# Altium PCB PCB1.PcbDoc (part 3 of 3)
Units mil, origin at the board's own origin, x right, y up, seen from the top; angles counter-clockwise.
Board outline 2560 x 1880 mil, 4 copper layers (Top Layer, GND, VCC, Bottom Layer), stack 23.756 mil thick; 156 components, 113 nets, 519 pads, 219 vias.
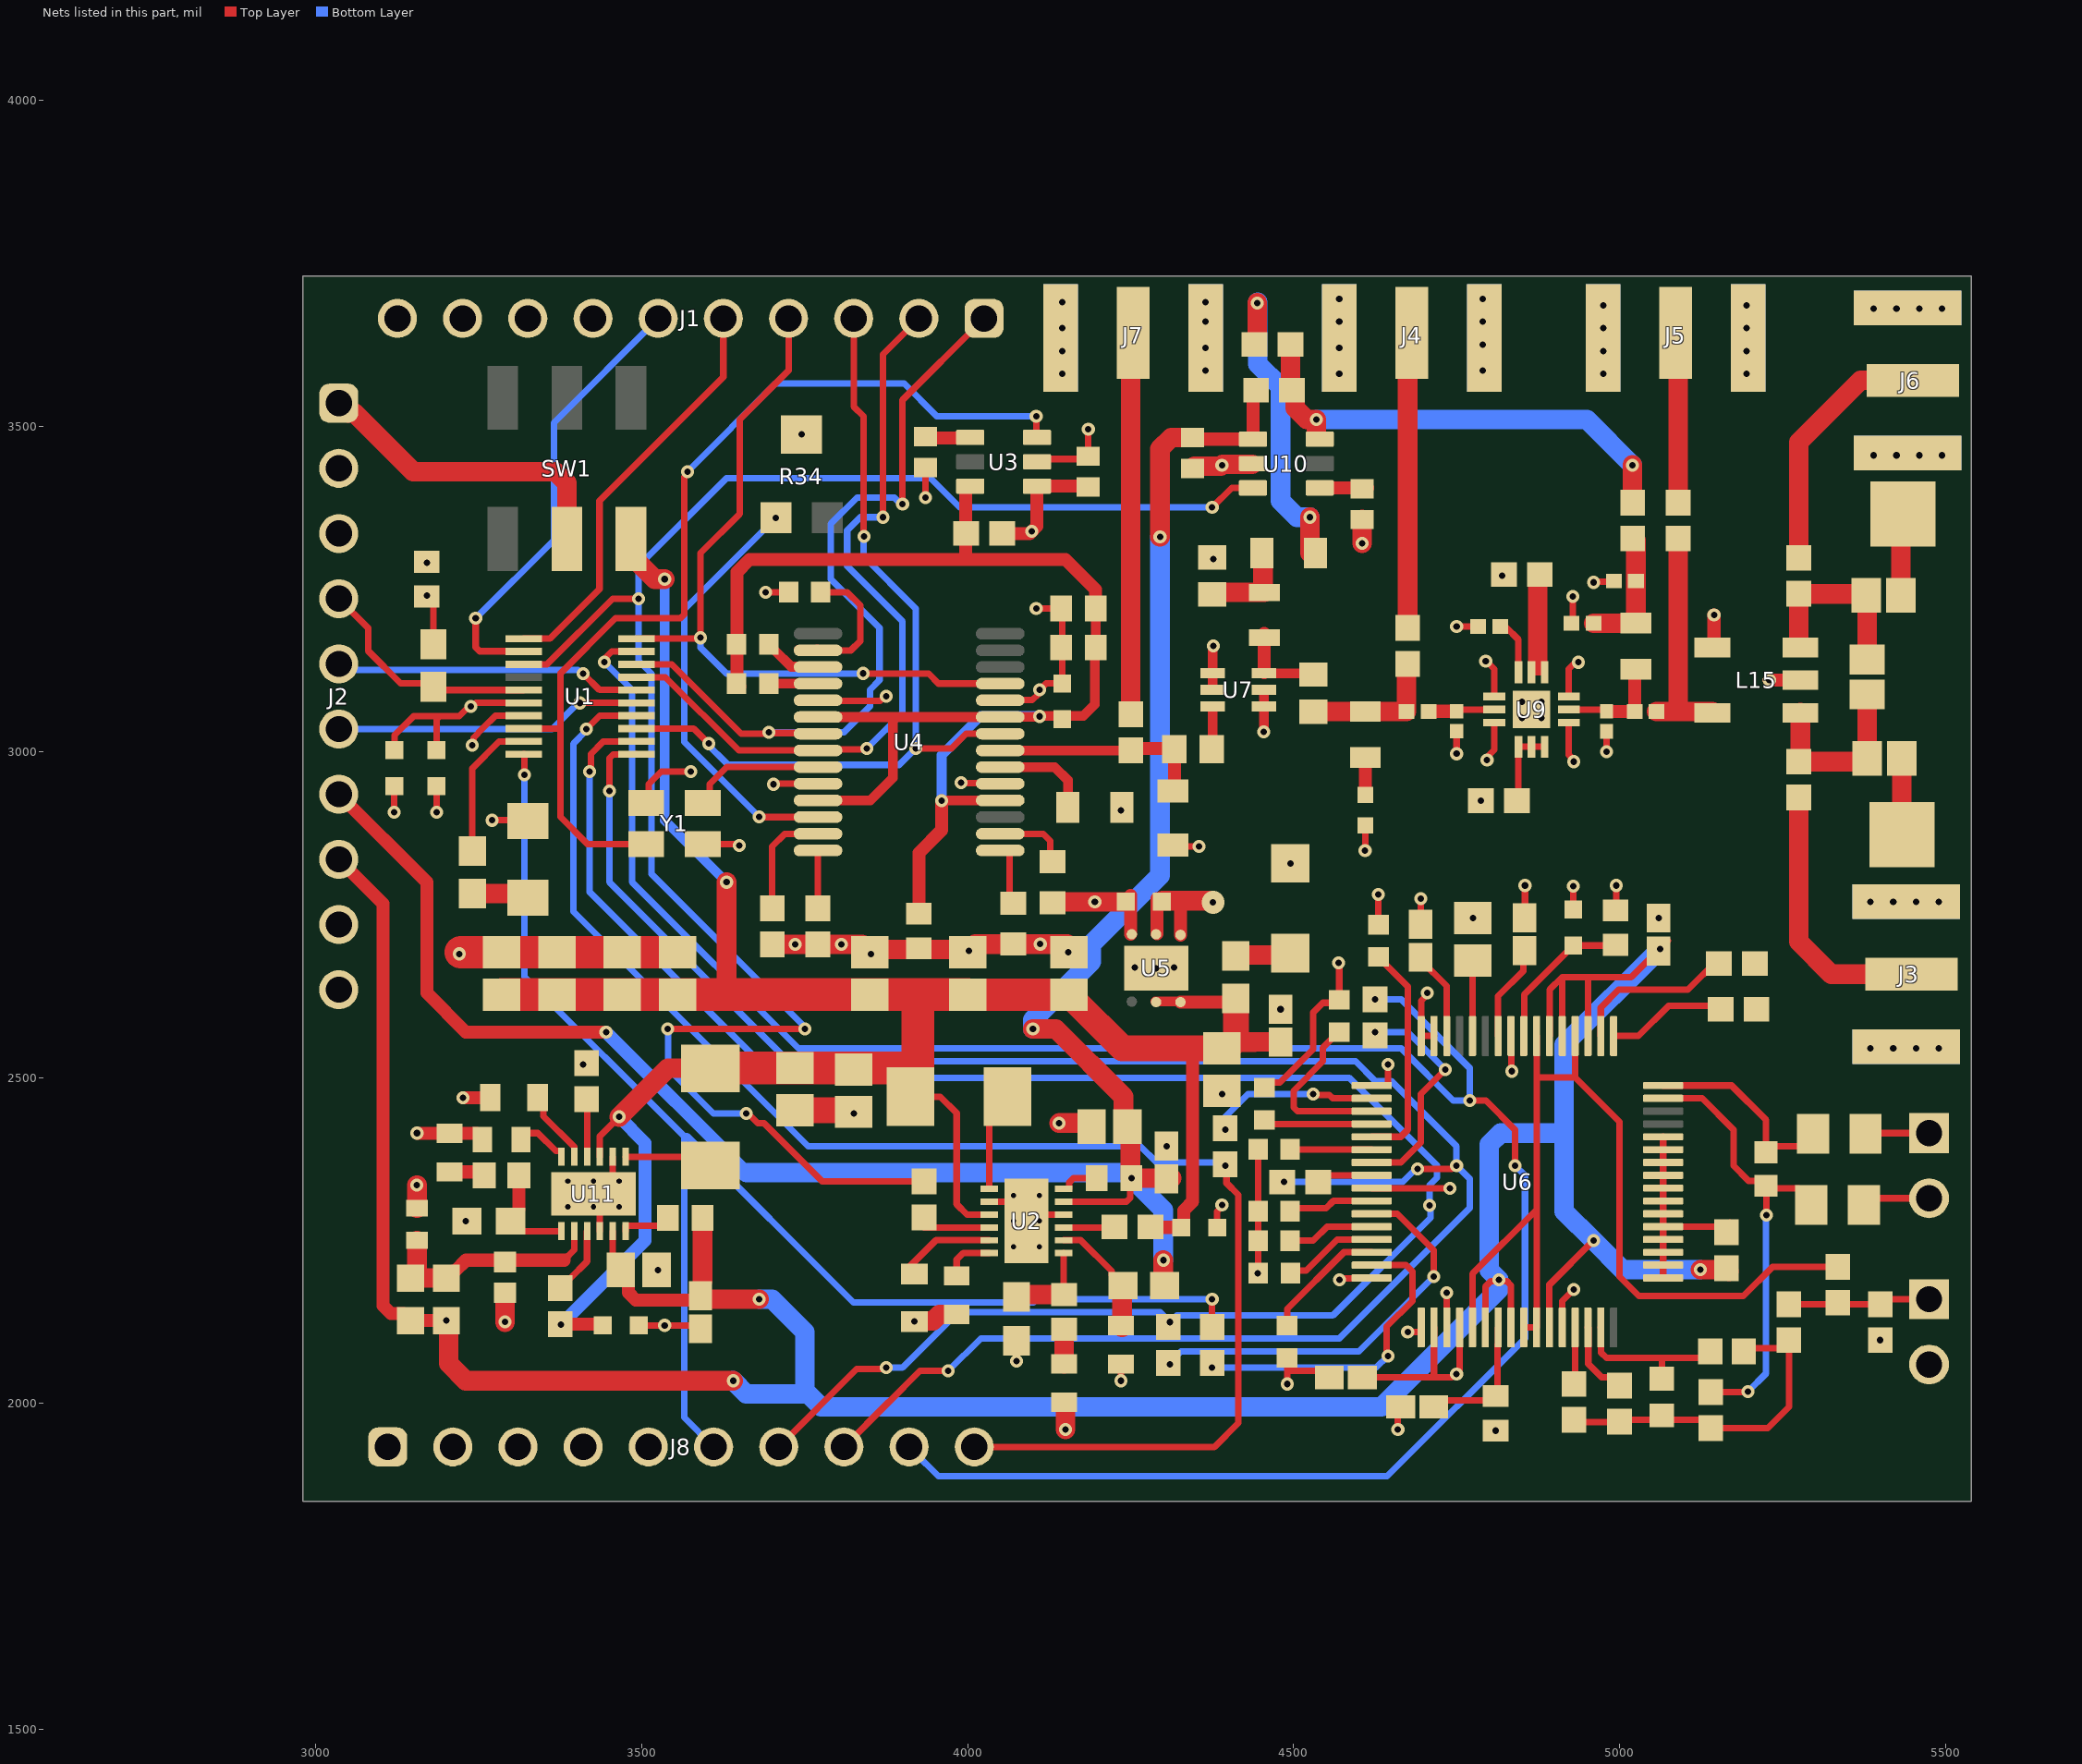
[diagram p4: the nets of this part, all layers, seen from the top]

## Via types
v1: diameter 20, hole 10, Top Layer to Bottom Layer, tented both sides, 206 vias
v2: diameter 19.68, hole 7.87, Top Layer to Bottom Layer, 12 vias
v3: diameter 35, hole 10, Top Layer to Bottom Layer, tented both sides, 1 vias

## Nets (pads, with @x,y where several pads share a name; then routed paths per layer and width w, separated by ;. In a path a pad name is that pad's centre, name@x,y a point inside that pad or via, vN(x,y) a via of type N, cw(c..) or ccw(c..) an arc to the next point about the centre after c; other vN are vias at no path point)
3V3: C1.2 C2.2 C3.2 C11.2 C20.2 C26.1 J2.9 R2.2 R12.2 R43.2 R61.2 U1.6 U3.1 U5.1 U5.2 U6.48 U6.50 U6.52 Y1.4 | length 1472
  Top Layer w10: C1.2@3120,3002.56 3120.48,3003.04 3120.48,3025.48 3150,3055 3190,3055 ; v1(3170,3240) 3180,3230 R2.2@3180,3165 ; C3.2@3185,3002.56 3185,3050 3190,3055 ; v1(3237.32,3069.84) 3234.62,3069.84 3219.77,3055 3190,3055 ; v1@3237.32,3072.68 3238.24,3071.76 3241.94,3071.76 3245.34,3075.16 U1.6@3318.5,3075.16 ; Y1.4@3506.69,2921.5 3510.32,2925.13 3510.32,2950.32 3529.82,2969.82 v1(3574.82,2969.82) ; R61.2@4458.94,2485 4458.94,2485.67 4465.99,2492.72 4479.09,2492.72 4530,2543.62 4530,2600 4544.87,2614.87 4565.5,2614.87 R43.2@4570,2619.37 v1@4570,2675 ; v1(4570.36,2190) 4573.06,2190 4575.3,2192.24 4619.17,2192.24 U6.48@4619.69,2192.75 ; C26.1@4610,2039.4 4610.6,2040 4742.29,2040 4747.29,2045 v1(4750,2045) 4750,2047.71 4754.73,2052.43 U6.52@4754.73,2116.77 ; 4715.36,2040.39 U6.50@4715.36,2116.77
  Top Layer w20: R12.2@4052.6,3335 4095,3335 v1(4098.09,3338.09) 4106.18,3346.18 U3.1@4106.18,3407.6 ; U3.1@4097.64,3407.6 U3.1@4106.18,3407.6 ; C11.2@4185,3406.38 C11.2@4186.38,3405 ; C11.2@4185,3407.6 U3.1@4106.18,3407.6 ; U5.2@4290.15,2721.15 C20.2@4290.15,2775 ; C20.2@4297.56,2770 C20.2@4299.03,2771.47 ; U5.1@4326.41,2719.17 4326.41,2771.47
  Top Layer w30: C20.2@4299.03,2771.47 4326.41,2771.47 4370.57,2771.47 4371.92,2770.12 4375.46,2770.12 v3(4376.41,2769.17)
  other v1: 4569.1,2676.29
3V3DDS: C13.2 C14.2 C15.2 C17.2 R12.1 R24.1 R35.1 U3.6 U4.6 U4.11 U4.18 U4.23 | length 2212.7
  Top Layer w10: v1(3960,2925) v1@3960.22,2925.22 ; U4.18@4049.55,2925.22 U4.18@4049.76,2925.43 ; C15.2@4196.17,3220.4 C15.2@4196.57,3220
  Top Layer w15: U4.11@3770.24,2925.43 3850.43,2925.43 3885,2960 3885,3053.39 ; U4.6@3770.24,3053.39 3885,3053.39 ; v1@3960.22,2925.22 U4.18@4049.55,2925.22 ; v1(4110,3054.41) 4109.49,3053.9 4050.28,3053.9 U4.23@4049.76,3053.39 3885,3053.39 ; v1@4110,3055 4142.44,3055 C17.2@4152.44,3055 ; C17.2@4157.66,3055.1 4177.16,3055.1 4195,3072.94 4195,3168.43 4196.57,3170 4196.57,3210 C15.2@4191.17,3215.4
  Top Layer w20: R24.1@3645.32,3105 R24.1@3650.24,3100.08 ; R24.1@3645.71,3105 3645.71,3170 3645.71,3275.71 3664.29,3294.29 ; 3665,3295 3996.8,3295 4150,3295 4196.17,3248.83 C15.2@4196.17,3220.4 ; C13.2@3925,2761.57 3925,2845 3960,2880 v1(3960,2925) ; 3996.8,3296 3996.8,3330 3996.8,3405.79 3998.61,3407.6 U3.6@4003.82,3407.6 ; C17.2@4142.44,3052.44 C17.2@4145,3049.88
  Bottom Layer w15: v1(3960,2925) 3960,2995 4020.1,3055.1 4109.31,3055.1 v1(4110,3054.41)
5V0: C16.2 C25.1 C35.1 C43.1 J2.8 R25.2 R49.2 R52.2 U6.19 U6.21 U6.22 U6.54 U6.56 U6.59 U11.11 | length 5139.6
  Top Layer w10: U11.11@3455.32,2264.49 3455.32,2255.79 3455,2255.47 3455,2217.41 C35.1@3467.41,2205 ; C43.1@3585,2170.22 3592.96,2178.17 3592.96,2188.15 3593.15,2188.34 ; C43.1@3590,2165.22 C43.1@3595.22,2160 ; U6.54@4794.1,2116.77 4794.1,2179.1 4803.09,2188.09 4813.09,2188.09 v1(4815,2190) 4816.91,2188.09 4826.77,2188.09 4833.47,2181.39 U6.56@4833.47,2116.77 ; U6.59@4892.52,2116.77 4892.52,2182.52 v1(4960,2250) ; U6.22@4892.52,2564.01 4893.03,2564.52 4893.03,2635.39 4911.92,2654.27 ; U6.21@4911.92,2564.3 4911.92,2654.27 ; U6.19@4951.58,2564.01 4951.58,2654.27 ; C25.1@5074.1,2710.39 5069.35,2710.39 5056.4,2697.44 5056.4,2692.69 5017.98,2654.27 4951.58,2654.27 ; R25.2@5164.1,2207.79 R25.2@5169.1,2202.79 ; 4911.92,2654.27 4951.58,2654.27
  Top Layer w20: J2.8@3035,2835 3102.99,2767.01 3102.99,2150 3114.71,2138.29 3134.09,2138.29 R52.2@3145,2127.38 ; R52.2@3145,2127.35 v1(3200,2127.35) ; C35.1@3467.41,2205 3479.16,2193.26 3479.16,2170.43 3490.87,2158.71 3583.5,2158.71 C43.1@3590,2165.22
  Top Layer w30: R49.2@3202.35,2125 v1(3200,2127.35) 3203.59,2123.75 3203.59,2061.41 3230,2035 v1(3640,2035) ; 3593.15,2188.34 C16.2@3593.15,2285 ; C43.1@3595.22,2160 v1(3680,2160) ; v1(5124.1,2205.39) 5165.55,2205.39 R25.2@5167.96,2202.99
  Bottom Layer w30: v1(3640,2035) 3660,2015 3755,2015 ; v1(3680,2160) 3700,2160 3750,2110 3750,2020 3755,2015 ; v1(5062.22,2697.73) 4915,2550.51 4915,2415 ; v1(5124.1,2205.39) 5004.61,2205.39 v1(4960,2250) 4915,2295 4915,2415 ; 3755,2015 3775,1995 4635,1995 4815,2175 v1(4815,2190) 4800,2205 4800,2397.43 4817.57,2415 4915,2415
12V0: C4.1 C5.2 C7.1 C47.2 J2.7 R3.2 R11.2 U2.11 U10.1 | length 3445
  Top Layer w10: U2.11@4147.17,2309.61 4243.24,2309.61 4249.09,2315.46 C5.2@4249.09,2335.87 ; C7.1@4312.77,2345.87 C7.1@4312.99,2345.65 ; R11.2@4437.64,3545.24 R11.2@4447.4,3555
  Top Layer w20: J2.7@3035,2935 3170,2800 3170,2630 3230,2570 v1(3445,2570) ; C47.2@4345,3482.24 4347.44,3479.8 U10.1@4437.64,3479.8 R11.2@4437.64,3545.24
  Top Layer w30: v1(4100,2575) 4135,2575 4238.96,2471.04 4238.96,2431.04 4249.57,2420.43 C5.2@4249.57,2345.87 ; v1(4251.14,2345.87) C7.1@4312.77,2345.87 ; v1(4295,3330) 4295,3465 4312.24,3482.24 C47.2@4345,3482.24 ; v1(4300,2220) 4300,2183.06 R3.2@4302.2,2180.87
  Bottom Layer w10: v1(4251.14,2345.87) v1@4251.84,2345.17
  Bottom Layer w20: v1(3445,2570) 3660.71,2354.29
  Bottom Layer w30: 3660.71,2354.29 3789.68,2354.29 4242.72,2354.29 v1(4251.14,2345.87) ; v1(4100,2575) 4100,2588.61 4189.33,2677.94 4189.33,2704.33 4295,2810 v1(4295,3330) ; v1@4251.84,2345.17 4300,2297.01 v1(4300,2220)
13V0PA: C36.2 C38.2 L3.2 R8.1 | length 195.7
  Top Layer w10: R8.1@5020,3337.28 R8.1@5022.52,3334.76 ; L3.2@5024.65,3197.09 L3.2@5025.08,3197.52
  Top Layer w30: C36.2@4960.08,3197.09 L3.2@5024.65,3197.09 ; L3.2@5025.08,3197.52 C38.2@5025.08,3262.09 R8.1@5025.08,3324.48
AFE_AGND: R46.2 U6.20 U6.23 U6.53 U6.57 U6.58 | length 1511.1
  Top Layer w10: U6.53@4774.41,2116.77 4774.41,2199.41 4872.84,2297.84 ; U6.57@4853.15,2116.77 U6.58@4872.84,2116.77 4872.84,2297.84 ; U6.23@4872.84,2564.01 4872.84,2500.39 ; U6.20@4931.89,2564.01 4931.89,2500.39 ; R46.2@5335,2210 5235,2210 5190,2165 5030,2165 5000,2195 5000,2432.28 4931.89,2500.39 ; 4872.84,2297.84 4872.84,2500.39 ; 4872.84,2500.39 4931.89,2500.39
BIAS: C23.1 R29.1 R31.1 R41.1 R42.1 R51.1 | length 548.6
  Top Layer w10: R29.1@4930,1974.8 4932.97,1971.83 R41.1@5008.7,1971.83 ; R41.1@5000,1972.4 R41.1@5012.6,1985 ; R41.1@5009.07,1971.46 5012.6,1975 R42.1@5065,1975 ; R42.1@5065,1981.83 5068.42,1978.42 5071.83,1975 5127.4,1975 R51.1@5140,1962.4 5227.4,1962.4 5260,1995 R31.1@5260,2097.4 5247.6,2085 C23.1@5190.59,2085
CS: J8.9 R62.2 U1.19 | length 3548.7
  Top Layer w10: v1@3440,3140 3453.9,3153.9 U1.19@3491.5,3153.9 ; v1(3442.23,3137.77) v1@3442.23,3140.48 ; v1(4770,2465) 4795,2465 4840,2420 v1(4840,2365)
  Bottom Layer w10: v1(3442.23,3137.77) 3485,3095 3485,2800 3740,2545 4665,2545 4745,2465 v1(4770,2465) 4770,2515 4665,2620 v1(4625,2620) ; J8.9@3910,1933.51 3910,1925 3918.51,1925 3954.92,1888.58 4643.58,1888.58 4855,2100 4855,2350 v1(4840,2365)
D7: J1.4 U1.20 U4.25 | length 1143
  Top Layer w10: U1.20@3491.5,3173.58 3588.58,3173.58 v1(3590,3175) 3590,3305 3650,3365 3650,3510 3725,3585 J1.4@3725,3665 ; v1(3839.64,3120.36) 3840,3120 3940,3120 3955.22,3104.78 4049.55,3104.78 U4.25@4049.76,3104.57
  Bottom Layer w10: v1(3590,3175) 3590.18,3174.82 3590.18,3159.82 3630,3120 3839.29,3120 v1(3839.64,3120.36)
DDS_OUT: C34.1 R16.2 R21.1 U4.21 | length 333.1
  Top Layer w10: R21.1@4315,2940 R21.1@4317.05,2942.05
  Top Layer w15: U4.21@4049.76,3002.2 4242.2,3002.2 R16.2@4245,3005
  Top Layer w20: R16.2@4245,3005 C34.1@4316.46,3005 ; R21.1@4317.05,2942.05 C34.1@4317.05,3004.41
DDS_RST: J1.3 U1.13 U4.22 | length 1303.2
  Top Layer w10: U1.13@3491.5,3035.79 3579.57,3035.79 v1(3602.68,3012.68) ; J1.3@3825,3665 3825,3530 3840,3515 3840,3331.81 v1(3841.08,3330.72) ; v1(3920,3005) 3975,3005 3997.8,3027.8 U4.22@4049.76,3027.8
  Bottom Layer w10: v1(3602.68,3012.68) 3602.68,3009.97 3607.68,3004.97 3607.68,3004.67 3622.39,2989.96 3632.35,2980 3895,2980 v1(3920,3005) 3920,3220 3840,3300 3840,3329.64 v1(3841.08,3330.72)
DDS_WCLK: J1.1 U1.18 U4.7 | length 1283.4
  Top Layer w10: U1.18@3491.5,3134.21 3546.05,3134.21 3652.18,3028.09 3693.09,3028.09 v1(3695,3030) 3696.1,3028.9 3769.13,3028.9 U4.7@3770.24,3027.8 ; v1(3900,3380) 3900,3540 4020,3660 4025,3660 J1.1@4025,3665
  Bottom Layer w10: v1(3695,3030) 3810,3030 3850,3070 3850,3095.36 3864.64,3110 3864.64,3190.36 3790,3265 3790,3350 3830,3390 3887.29,3390 3897.29,3380 v1(3900,3380)
DRDY: J8.6 R53.2 U1.10 | length 2144.3
  Top Layer w10: U1.10@3318.5,2996.42 3319.5,2996.42 3320,2995.92 v1(3320,2965) ; R53.2@4375,2117.6 v1(4375,2160)
  Bottom Layer w10: v1(3320,2965) 3320,2655 3565,2410 ; J8.6@3610,1933.51 3565,1978.51 3565,2410 ; v1(4375,2160) 4105.97,2160 4100.97,2155 3824.64,2155 3569.64,2410 3565,2410
"Electrode 1": L14.2 pad.2@5433.22,2873.22 | length 116.8
  Top Layer w30: pad.2@5433.22,2873.22 L14.2@5433.22,2990
"Electrode 2": L17.1 pad.2@5435,3365 | length 126.4
  Top Layer w10: pad.2@5431.61,3361.61 pad.2@5435,3365
  Top Layer w30: L17.1@5431.61,3240 pad.2@5431.61,3361.61
FQ_UD: J1.2 U1.17 U4.8 | length 1185.2
  Top Layer w10: U1.17@3491.5,3114.53 3536.18,3114.53 3648.51,3002.2 U4.8@3770.24,3002.2 3771.63,3003.6 3843.6,3003.6 v1(3845,3005) ; v1(3870,3360) 3870,3610 J1.2@3925,3665
  Bottom Layer w10: v1(3845,3005) 3900,3060 3900,3200 3815,3285 3815,3340 3835,3360 v1(3870,3360)
GND: C1.1 C2.1 C3.1 C4.2 C6.1 C7.2 C9.1 C10.2 C11.1 C12.1 C13.1 C14.1 C15.1 C17.1 C18.1 C19.2 C20.1 C21.2 C22.2 C25.2 C26.2 C27.2 C28.2 C29.1 C30.1 C31.2 C32.2 C35.2 C36.1 C37.1 C38.1 C41.1 C42.1 C43.2 C45.1 C47.1 C48.1 C55.2 C61.2 C62.2 C63.2 C64.2 C65.2 C66.2 C67.2 C68.2 C69.2 C70.2 D1.1 D2.1 J1.7 J1.8 J1.9 J1.10 J2.2 J2.3 J2.10 J3.2 J3.3 J3.4 J3.5 J4.2 J4.3 J4.4 J4.5 J5.2 J5.3 J5.4 J5.5 J6.2 J6.3 J6.4 J6.5 J7.2 J7.3 J7.4 J7.5 J8.1 J8.2 J8.3 J8.4 J8.5 L15.2 L15.5 P3.2 R1.2 R5.1 R6.1 R7.1 R18.1 R19.1 R20.2 R21.2 R22.2 R23.2 R26.2 R27.2 R28.2 R30.2 R34.2 R36.1 R39.1 R40.1 R44.2 R47.1 R57.1 R58.1 R59.1 R60.1 R64.1 R65.1 U1.7 U2.2 U2.10 U2.13 U3.2 U4.5 U4.10 U4.19 U4.24 U5.3 U5.7 U6.25 U6.31 U6.32 U6.33 U6.41 U6.49 U6.51 U6.60 U7.1 U7.2 U7.4 U7.5 U9.1 U9.3 U9.7 U9.9 U9.13 U10.2 U11.2 U11.10 U11.13 Y1.2 | length 4797.5
  Top Layer w10: v1(3120,2907.44) C1.1@3120,2947.44 ; v1(3155,2415) v1@3155.24,2414.76 ; v1(3170,3290) C2.1@3170,3291.57 ; v1(3185,2907.44) C3.1@3185,2947.44 ; R40.1@3204.76,2414.76 R40.1@3205,2414.53 ; v1(3239.82,3010) 3241.74,3011.91 3241.74,3021.71 3256.14,3036.11 3275.5,3055.47 U1.7@3318.5,3055.47 ; R39.1@3245.94,2414.53 R39.1@3255.47,2405 ; v1(3270,2895) 3324.06,2895 D1.1@3325,2894.06 ; U11.10@3435.63,2264.49 3435.63,2311.73 U11.13@3425.79,2321.57 3426.85,2321.57 3455.32,2350.04 U11.2@3455.32,2378.66 ; C18.1@3495,2120 v1(3535,2120) 3584.78,2120 C43.2@3590,2114.78 ; C35.2@3522.59,2205 v1(3525,2205) ; Y1.2@3596.81,2855 Y1.2@3593.31,2858.5 v1@3648.5,2858.5 ; v1(3690,3245) R36.1@3725,3245 ; v1@3700,2950 3701.02,2951.02 U4.10@3770.24,2951.02 ; U4.5@3770.24,3078.98 3771.05,3078.16 3865.45,3078.16 3872.29,3085 v1(3875,3085) ; C62.2@3820,2450 v1(3825,2445) ; C66.2@3837.71,2704.8 C66.2@3850,2692.51 ; v1(3917.99,2125.87) 3920.13,2125.87 C10.2@3920.33,2126.06 ; v1(3935,3390) C12.1@3935,3436.38 ; v1(3990,2952.72) 3990.85,2951.87 4048.92,2951.87 U4.19@4049.76,2951.02 ; C67.2@3995.91,2708.43 4000,2712.51 C67.2@4007.51,2705 ; U2.2@4032.99,2309.61 4061.61,2309.61 4090.08,2281.14 U2.13@4090.08,2280.08 4099.92,2289.92 U2.10@4147.17,2289.92 ; U4.24@4050.2,3079.41 4099.14,3079.41 4108.09,3088.35 4108.09,3093.09 v1(4110,3095) 4110.48,3095 4120.48,3105 C17.1@4145,3105 4145,3218.43 C15.1@4143.43,3220 v1(4105,3220) ; U3.2@4106.18,3445 4110.49,3449.31 4180.69,3449.31 C11.1@4185,3453.62 v1(4185,3495) ; R22.2@4130,2768.5 R22.2@4133.5,2765 ; C65.2@4152.51,2705 C65.2@4155,2702.51 ; v1(4235,2035) 4235,2058.36 R6.1@4240,2063.36 ; R21.2@4315,2857.32 4317.32,2855 v1(4355,2855) ; C47.1@4345,3435 C47.1@4348.09,3438.09 ; v1@4375,3165 v1@4375.63,3164.37 ; C6.1@4382.56,2270 4382.56,2294.85 4390,2302.29 v1(4390,2305) ; v1@4388.09,3438.09 v1(4390,3440) v1@4391.2,3441.2 ; U10.2@4436.44,3441.2 U10.2@4437.64,3442.4 ; v1(4445,2200) R27.2@4445.63,2200 4445.47,2200.16 4445.47,2379.84 R1.2@4445.32,2380 ; v1(4490,2030) 4490,2050 ; R26.2@4490,2070.32 4490,2050 ; C26.2@4554.68,2040.1 4544.78,2050 4490,2050 ; v1(4609.66,2848.54) 4609.87,2848.75 4609.87,2886.88 R47.1@4610.08,2887.09 ; U6.41@4619.69,2330.55 4739.45,2330.55 v1(4740,2330) ; U6.33@4620,2488.54 4644.51,2488.54 4644.51,2519.51 v1(4645,2520) ; R44.2@4630,2734.68 v1@4630,2780.32 ; v1(4660,1960) 4660,1990.43 C22.2@4664.56,1995 ; v1(4675,2110) 4695.16,2110 4695.67,2110.51 U6.49@4695.67,2116.77 ; C27.2@4695,2735.22 v1(4695,2775) ; v1(4705,2630) 4705,2627.29 4695.67,2617.96 U6.32@4695.67,2564.01 U6.31@4715.36,2564.01 ; U6.51@4735.04,2116.77 v1(4735,2170) ; v1(4750.08,2997.09) C42.1@4750.08,3031.73 ; v1(4750.08,3192.09) C37.1@4783.21,3192.09 ; v1@4795,2990 4807.91,3002.91 U9.3@4807.91,3044.92 ; v1@4795,3140 4807.91,3127.09 U9.1@4807.91,3085.08 ; U6.25@4833.47,2564.01 4833.98,2563.5 4833.98,2511.02 v1(4835,2510) ; C31.2@4854.1,2745.61 4855,2746.51 v1(4855,2795) ; U6.60@4912.21,2116.77 4912.21,2157.21 v1(4930,2175) ; U9.7@4922.09,3044.92 4922.09,2995.62 4930,2987.71 v1(4930,2985) ; U9.9@4922.09,3085.08 4922.09,3127.09 v1@4935,3140 ; C36.1@4926.33,3197.09 4928.17,3198.92 v1(4928.17,3238.17) ; C29.1@4929.1,2757.95 v1(4929.1,2794.1) ; v1(4960,3260) 4961.04,3261.04 4990.29,3261.04 C38.1@4991.33,3262.09 ; v1(4980,3000) 4980.08,3000.08 C41.1@4980.08,3031.38 ; C30.1@4994.1,2756.97 4995,2757.87 v1(4995,2795) ; L15.5@5142.48,3160 L15.5@5145,3162.52
  Top Layer w15: U7.2@4375.63,3095 U7.1@4375.63,3120.59 v1@4375.63,3164.37 ; v1(4454.37,3030.63) U7.4@4454.37,3069.41 U7.5@4454.37,3095
  Top Layer w20: v1@3155.24,2414.76 R40.1@3204.76,2414.76 ; R40.1@3205,2414.53 R39.1@3245.94,2414.53 ; v1(3225.51,2469.49) C55.2@3267.17,2469.49 ; C20.1@4242.44,2770 C20.1@4246.22,2766.22 ; U5.3@4250.15,2720.01 C20.1@4250.15,2779.85 ; L15.5@5145,3162.52 v1(5145,3210) ; v1(5230,3110) L15.2@5277.52,3110
  Top Layer w30: R65.1@3155,2299.78 v1@3155,2335 ; v1@3290,2125 R64.1@3290,2170 ; R18.1@3700,2704.8 v1(3735,2704.8) R19.1@3770,2704.8 C66.2@3837.71,2704.8 ; C66.2@3850,2692.51 3854.26,2696.77 3999.99,2696.77 v1(4001.82,2694.95) 4011.87,2705 R20.2@4070,2705 v1(4111.26,2705) C65.2@4152.51,2705 ; v1(3917.99,2125.87) 3918.74,2126.61 3946.61,2126.61 3956.81,2136.81 R5.1@3982.99,2136.81 ; R22.2@4133.5,2770 v1(4195,2770) C20.1@4241.35,2770 ; v1(4140,2430) 4140.65,2430.65 4184.17,2430.65 C4.2@4189.82,2425 ; R7.1@4147.99,2001.81 4149.76,2001.81 4150,2001.57 v1(4150,1960) ; C47.1@4348.09,3438.09 v1@4388.09,3438.09 ; v1@4391.2,3441.2 U10.2@4436.44,3441.2 ; v1(4605,3320) C48.1@4605,3356.38
  Top Layer w40: C61.2@3735,2450 C62.2@3820,2450
  Top Layer w50: v1@3222.51,2692.51 C70.2@3285,2692.51 C69.2@3370,2692.51 C68.2@3470,2692.51 C63.2@3555,2692.51
  Bottom Layer w10: J8.3@3310,1933.51 J8.3@3310,1946.99
  other v1: 4810,1958.43 4075,2065 5400,2097.4 3289.76,2125.24 3230,2280 3154.76,2335.24 4305,2395 4390,2475 3410,2520 5385,2545 5420,2545 5455,2545 5490,2545 4480,2605 4289.01,2667.99 4256.41,2669.17 4316.41,2669.17 3220,2690 3851.82,2689.95 4154.33,2692.44 3806.34,2704.44 4775,2745.02 5060,2745 5385,2770 5420,2770 5455,2770 5490,2770 4629.85,2780.91 4495,2828.9 3649.68,2856.09 4235,2910 4787.4,2925 3701.69,2950.2 4796.82,2987.44 4850.08,3052.09 4880.08,3052.09 4850.08,3077.09 4880.08,3077.09 4936.82,3137.44 4794.72,3139.01 4376.82,3162.44 4820,3270 4376.82,3295.98 5390,3455 5425,3455 5460,3455 5495,3455 3745,3487.09 4145,3580 4570,3580 4975,3580 5195,3580 4365,3585 4790,3585 4145,3615 4975,3615 5195,3615 4365,3620 4570,3620 4790,3625 4145,3650 4975,3650 5195,3650 4365,3660 4570,3660 4790,3660 5390,3680 5425,3680 5460,3680 5495,3680 4975,3685 5195,3685 4145,3690 4365,3690 4570,3695 4790,3695
  other v2: 4070.39,2240.71 4109.76,2240.71 4070.39,2280.08 4109.76,2280.08 3386.42,2301.89 3425.79,2301.89 3465.16,2301.89 4070.39,2319.45 4109.76,2319.45 3386.42,2341.26 3425.79,2341.26 3465.16,2341.26
IN-: P1.1 R33.1 | length 104.6
  Top Layer w10: R33.1@5370.35,2415 P1.1@5475,2415
NetC5_1: C5.1 U2.12 | length 63.4
  Top Layer w10: U2.12@4147.17,2329.29 4155.87,2329.29 4155.94,2329.37 4155.94,2339.72 4161.88,2345.65 C5.1@4197.78,2345.65
NetC8_1: C8.1 R7.2 | length 53.4
  Top Layer w30: R7.2@4147.99,2060.87 C8.1@4147.99,2114.29
NetC8_2: C8.2 C9.2 U2.7 | length 147.8
  Top Layer w10: C8.2@4140.55,2160 C8.2@4147.99,2167.44 ; C8.2@4147.17,2168.27 U2.7@4147.17,2230.87
  Top Layer w30: C9.2@4075,2163.46 4078.98,2167.44 C8.2@4147.99,2167.44
NetC10_1: C10.1 U2.5 | length 143.9
  Top Layer w10: C10.1@3907.24,2206.61 3951.18,2250.55 U2.5@4032.99,2250.55
NetC12_2: C12.2 U3.4 | length 68.9
  Top Layer w10: U3.4@4003.23,3481.81 U3.4@4003.82,3482.4
  Top Layer w20: C12.2@3935.2,3481.81 U3.4@4003.23,3481.81
NetC16_1: C16.1 U11.12 | length 78.6
  Top Layer w10: U11.12@3475,2264.49 3475,2273.03 3475.08,2273.11 3528.27,2273.11 3540,2284.84 C16.1@3540,2285
NetC21_1: C21.1 C22.1 U6.55 | length 208.7
  Top Layer w10: C22.1@4715,1995 4725,2005 4803.43,2005 C21.1@4810,2011.57 ; C21.1@4803.18,2013.39 4813.09,2023.31 4813.09,2090.88 4813.27,2091.06 U6.55@4813.27,2116.08
NetC23_2: C23.2 R42.2 U6.63 | length 241.6
  Top Layer w10: U6.63@4971.26,2116.77 4971.77,2116.26 4971.77,2078.23 4980,2070 5065,2070 ; R42.2@5065,2045 5065,2070 ; C23.2@5139.41,2085 5139.41,2084.02 5125.71,2070.31 5120.17,2070.31 5119.85,2070 5065,2070
NetC24_1: C24.1 R32.2 R51.2 U6.15 | length 710.3
  Top Layer w10: U6.15@5066.93,2468.34 5126.66,2468.34 5175,2420 5175,2365 5198.14,2341.86 5212.35,2341.86 5219.8,2334.41 C24.1@5225,2334.41 5225.45,2333.96 v1(5225.45,2289.36) ; R51.2@5140,2017.6 v1@5192.6,2017.6 ; C24.1@5219.8,2330.2 C24.1@5225,2330.2 ; C24.1@5229.59,2330.2 5274.69,2330.2 5294.29,2310.59 R32.2@5294.29,2305
  Bottom Layer w10: v1(5197.11,2018.45) 5225,2046.34 v1@5225,2290
NetC24_2: C24.2 R33.2 U6.16 | length 313
  Top Layer w10: U6.16@5066.93,2488.03 5171.97,2488.03 5225,2435 5225,2395 C24.2@5225,2385.59 5234.41,2395 5278.11,2395 R33.2@5296.88,2413.77
NetC27_1: C27.1 U6.30 | length 132.4
  Top Layer w10: C27.1@4695.47,2680 4734.7,2640.77 4734.7,2564.35 U6.30@4735.04,2564.01
NetC28_1: C28.1 U6.28 | length 128.5
  Top Layer w10: U6.28@4774.41,2564.01 C28.1@4774.41,2692.49
NetC31_1: C31.1 U6.26 | length 147.9
  Top Layer w10: U6.26@4813.78,2564.01 4813.78,2625.08 4852.47,2663.77 4852.47,2693.55 C31.1@4854.1,2695.17
NetC32_1: C32.1 L2.2 R38.1 | length 143.3
  Top Layer w30: C32.1@4375,3241.46 4378.19,3244.65 L2.2@4455,3244.65 4453.06,3246.59 4453.06,3303.06 R38.1@4451.11,3305
NetC33_1: C33.1 L2.1 U7.6 | length 137.6
  Top Layer w10: U7.6@4454.37,3120.59 U7.6@4455,3121.22 ; C33.1@4527.95,3120.59 C33.1@4530,3118.54
  Top Layer w15: U7.6@4454.37,3120.59 C33.1@4527.95,3120.59
  Top Layer w20: U7.6@4455,3121.22 L2.1@4455,3181.42
NetC33_2: C33.2 C39.1 L4.2 R10.2 | length 204.7
  Top Layer w10: C33.2@4530,3061.46 C33.2@4534.51,3056.95
  Top Layer w20: R10.2@4673.21,3133.21 R10.2@4675,3135
  Top Layer w30: C33.2@4548.51,3062.09 L4.2@4610.08,3062.09 C39.1@4673.21,3062.09 R10.2@4673.21,3133.21
NetC34_2: C34.2 U7.3 | length 67.3
  Top Layer w10: C34.2@4373.54,3005 C34.2@4374.13,3004.41 C34.2@4375.63,3004.41
  Top Layer w15: C34.2@4375.63,3004.41 U7.3@4375.63,3069.41
NetC37_2: C37.2 U9.12 | length 77.4
  Top Layer w10: C37.2@4825.7,3191.46 4845,3172.17 4845,3122.17 U9.12@4844.92,3122.09
NetC39_2: C39.2 C42.2 U9.2 | length 102.2
  Top Layer w10: C39.2@4706.95,3062.09 C39.2@4707.13,3062.26 ; C42.2@4749.9,3062.26 4752.64,3065 U9.2@4807.91,3065
  Top Layer w20: C39.2@4707.13,3062.26 C42.2@4749.9,3062.26
NetC40_1: C40.1 C41.2 L3.1 U9.8 | length 167.7
  Top Layer w10: U9.8@4922.09,3065 4977.17,3065 C41.2@4980.08,3062.09 ; L3.1@5023.21,3124.78 L3.1@5025.08,3126.65
  Top Layer w20: C41.2@4980.08,3062.09 C40.1@5023.21,3062.09 L3.1@5023.21,3124.78
NetC40_2: C40.2 L15.4 R13.2 | length 353.2
  Top Layer w30: C40.2@5056.95,3062.09 5087.21,3062.09 L15.4@5142.48,3062.09 ; 5090,3062.09 R13.2@5090,3329.8
NetC44_1: C44.1 R40.2 | length 55.7
  Top Layer w10: C44.1@3252.95,2355.47 C44.1@3258.43,2350
  Top Layer w20: R40.2@3205,2355.47 C44.1@3252.95,2355.47
NetC44_2: C44.2 C45.2 U11.7 | length 188
  Top Layer w10: C45.2@3283.46,2295 3285.43,2295 C45.2@3299.45,2280.98 ; C45.2@3293.46,2280 C45.2@3295.43,2280 ; C45.2@3311.57,2298.11 3311.1,2297.64 3311.1,2295.67 C45.2@3295.43,2280 ; U11.7@3376.57,2264.49 3310.94,2264.49 C45.2@3295.43,2280
  Top Layer w20: C45.2@3311.57,2298.11 C44.2@3311.57,2350
NetC48_2: C48.2 U10.4 | length 73.6
  Top Layer w20: U10.4@4540,3405 C48.2@4613.62,3405
NetC55_1: C55.1 U11.5 | length 114.1
  Top Layer w10: C55.1@3340,2469.49 3349.07,2460.42 3349.07,2440.93 3396.26,2393.74 U11.5@3396.26,2378.66
NetD1_2: D1.2 R50.1 | length 97.7
  Top Layer w10: D1.2@3318.5,2782.44 D1.2@3325,2775.94
  Top Layer w30: R50.1@3240,2782.44 D1.2@3328.5,2782.44
NetD2_2: D2.2 R55.1 | length 82.1
  Top Layer w30: R55.1@4415,2685.97 4417.32,2688.29 4492.19,2688.29 D2.2@4495,2691.1
NetJ2_1: J2.1 SW1.2 | length 486.5
  Top Layer w30: J2.1@3035,3535 3049.92,3520.08 3059.24,3520.08 3149.32,3430 3367.43,3430 3385,3412.43 SW1.2@3385,3326.73
NetJ3_1: J3.1 R9.2 | length 414.6
  Top Layer w30: R9.2@5275,2929.8 5275,2708.78 5325,2658.78 J3.1@5447.87,2658.78
NetJ4_1: J4.1 R10.1 | length 507.7
  Top Layer w30: R10.1@4675,3190.2 J4.1@4675,3697.91
NetJ5_1: J5.1 R13.1 | length 284.1
  Top Layer w10: J5.1@5086.22,3642.87 5086.22,3608.4 J5.1@5090,3604.62 ; J5.1@5090.48,3604.62 J5.1@5106.22,3620.36
  Top Layer w30: R13.1@5090,3382.6 J5.1@5090,3604.62
NetJ6_1: J6.1 R17.1 | length 391.7
  Top Layer w30: R17.1@5275,3297.6 5275,3475 5369.99,3569.99 J6.1@5450,3570
NetJ7_1: J7.1 R16.1 | length 586.8
  Top Layer w30: R16.1@4250,3057.6 4250,3639.09 J7.1@4253.78,3642.87
NetL1_2: L1.2 U2.1 | length 141.6
  Top Layer w10: U2.1@4032.99,2329.29 L1.2@4032.99,2470.87
NetL4_1: L4.1 R47.2 | length 57.1
  Top Layer w20: R47.2@4610.08,2934.09 L4.1@4610.08,2991.22
NetL5_2: L5.2 U11.1 | length 135.5
  Top Layer w10: U11.1@3475,2378.66 3591.84,2378.66 L5.2@3605,2365.5
NetL14_1: L14.1 L15.3 L16.2 R9.1 | length 266.5
  Top Layer w10: R9.1@5275,2985 R9.1@5277.52,2987.52 ; L14.1@5375,2985 L14.1@5380,2990
  Top Layer w30: R9.1@5275,2985 L14.1@5375,2985 ; R9.1@5277.52,2987.52 L15.3@5277.52,3060 ; L14.1@5380,2990 L16.2@5380,3073.39
NetL15_1: L15.1 L16.1 L17.2 R17.2 | length 302.8
  Top Layer w10: L15.1@5275,3162.52 L15.1@5277.52,3160 ; L17.2@5377.6,3242.4 L17.2@5380,3240 ; L16.1@5380,3126.61 L16.1@5380,3141.61
  Top Layer w30: L15.1@5275,3162.52 R17.2@5275,3242.4 L17.2@5377.6,3242.4 ; L16.1@5380,3141.61 L17.2@5380,3240
NetP1_2: P1.2 R32.1 | length 104.1
  Top Layer w10: R32.1@5375,2305 5385,2315 P1.2@5475,2315
NetP3_1: P3.1 R31.2 R46.1 R57.2 | length 205
  Top Layer w10: R31.2@5260,2152.6 R57.2@5400,2152.6 ; R57.2@5410,2160 P3.1@5475,2160
NetR1_1: R1.1 U6.38 | length 129
  Top Layer w10: R1.1@4494.68,2380 4504.29,2389.6 U6.38@4619.69,2389.6
NetR3_1: R3.1 R6.2 U2.8 | length 188.1
  Top Layer w10: U2.8@4147.17,2250.55 4173.31,2250.55 4220.65,2203.21 4220.65,2196.77 4236.56,2180.87 R3.1@4237.99,2180.87
  Top Layer w30: R6.2@4236.89,2116.64 4236.89,2174.96 4237.99,2176.06 R3.1@4237.99,2180.87
NetR4_2: R4.2 U2.9 | length 72.9
  Top Layer w10: U2.9@4147.17,2270.24 4207.13,2270.24 4212.98,2264.38 R4.2@4212.98,2259.73
NetR5_2: R5.2 U2.6 | length 79.1
  Top Layer w10: R5.2@3982.99,2195.87 3982.99,2220.87 3992.99,2230.87 U2.6@4032.99,2230.87
NetR8_2: R8.2 R11.1 R15.2 U10.6 | length 744.5
  Top Layer w10: U10.6@4535,3484.8 U10.6@4540,3479.8
  Top Layer w30: R15.2@4495.2,3625 4495.2,3557.4 R11.1@4497.6,3555 4498.54,3555 4502.41,3551.14 4502.41,3527.57 4519.98,3510 v1(4535,3510) U10.6@4535,3484.8 ; R8.2@5020,3382.6 v1(5020,3440)
  Bottom Layer w30: v1(4535,3510) 4950,3510 v1(5020,3440)
NetR14_1: R14.1 U1.3 U10.3 | length 2798.8
  Top Layer w10: U1.3@3318.5,3134.21 3354.21,3134.21 3455,3235 v1(3495,3235) ; v1(3539.82,2574.82) 3540,2575 v1(3750,2575) ; v1(3660,2445) 3662.71,2445 3677.67,2430.03 3687.46,2430.03 3776.63,2340.87 R14.1@3932.99,2340.87 ; v1(4375,3375) 4405,3405 U10.3@4437.64,3405
  Bottom Layer w10: v1(3539.82,2574.82) 3540,2574.64 3540,2515 3610,2445 v1(3660,2445) ; v1(3750,2575) 3750,2577.71 3515,2812.71 3515,3120 3495,3140 v1(3495,3235) 3495,3285 3630,3420 3942.78,3420 3987.78,3375 v1(4375,3375)
NetR14_2: R14.2 U2.4 | length 100.1
  Top Layer w10: R14.2@3932.99,2270.24 U2.4@4032.99,2270.24 U2.4@4032.91,2270.32
NetR18_2: R18.2 U4.13 | length 173.2
  Top Layer w10: R18.2@3700,2760 3700,2855 3719.25,2874.25 U4.13@3770.24,2874.25
NetR19_2: R19.2 U4.14 | length 91.1
  Top Layer w10: R19.2@3770.24,2757.56 U4.14@3770.24,2848.66
NetR20_1: R20.1 U4.15 | length 95.4
  Top Layer w10: U4.15@4049.76,2848.66 4060.64,2848.66 4064.2,2845.1 4064.2,2773.79 R20.1@4070,2767.99
NetR22_1: R22.1 U4.16 | length 125.9
  Top Layer w10: U4.16@4049.76,2874.25 4115.75,2874.25 4126.65,2863.35 R22.1@4126.65,2839.85 ; R22.1@4126.65,2834.85 R22.1@4141.5,2820
NetR23_1: R23.1 U4.20 | length 153.6
  Top Layer w15: U4.20@4049.76,2976.61 4133.39,2976.61 4153.66,2956.34 R23.1@4153.66,2915
NetR24_2: R24.2 U4.4 | length 77.6
  Top Layer w15: R24.2@3695.75,3096.97 3703.35,3104.57 U4.4@3770.24,3104.57
NetR25_1: R25.1 U6.1 U6.2 U6.3 U6.4 U6.5 U6.6 U6.7 U6.8 U6.9 U6.10 U6.11 U6.12 | length 321.3
  Top Layer w10: U6.1@5066.93,2192.75 U6.2@5066.93,2212.44 U6.3@5066.93,2232.12 U6.4@5066.93,2251.81 U6.5@5066.93,2271.49 ; U6.12@5066.93,2409.29 U6.11@5066.93,2389.6 U6.10@5066.93,2369.92 U6.9@5066.93,2350.23 U6.8@5066.93,2330.55 U6.7@5066.93,2310.86 U6.6@5066.93,2291.18 U6.5@5066.93,2271.49 ; R25.1@5169.1,2277.79 5162.8,2271.49 U6.5@5066.93,2271.49
NetR26_1: R26.1 U6.46 | length 191.1
  Top Layer w10: R26.1@4490,2119.68 4490,2145 4577.12,2232.12 U6.46@4619.69,2232.12
NetR27_1: R27.1 U6.45 | length 146.1
  Top Layer w10: R27.1@4495,2200 4499.07,2204.07 4519.07,2204.07 4566.81,2251.81 U6.45@4619.69,2251.81
NetR28_1: R28.1 U6.44 | length 133.9
  Top Layer w10: R28.1@4494.68,2250 4530,2250 4551.49,2271.49 U6.44@4619.69,2271.49
NetR29_2: R29.2 U6.61 | length 87.6
  Top Layer w10: R29.2@4930,2030 4931.89,2031.89 U6.61@4931.89,2116.77
NetR30_1: R30.1 U6.42 | length 134.2
  Top Layer w10: R30.1@4490,2300 4550,2300 4560.86,2310.86 U6.42@4619.69,2310.86
NetR34_1: R34.1 U4.12 | length 655.3
  Top Layer w10: v1(3680,2900) 3680.08,2899.92 3770.16,2899.92 U4.12@3770.24,2899.84
  Bottom Layer w10: v1(3680,2900) 3565,3015 3565,3218.5 v1(3705.63,3359.13)
NetR35_2: R35.2 U4.3 | length 90.6
  Top Layer w15: R35.2@3694.68,3165 3694.68,3163.94 3702.11,3156.51 3703.17,3156.51 3729.01,3130.68 3769.72,3130.68 U4.3@3770.24,3130.16
NetR36_2: R36.2 U4.2 | length 225.3
  Top Layer w10: U4.2@3768.76,3157.22 U4.2@3770.24,3155.75 3820.75,3155.75 3835,3170 3835,3225 3815,3245 R36.2@3774.37,3245
  Top Layer w15: U4.2@3740.44,3156.27 3768.02,3156.27 U4.2@3768.76,3157
NetR37_2: R37.2 U6.17 | length 168.1
  Top Layer w10: U6.17@4990.95,2564.01 5029.01,2564.01 5075,2610 R37.2@5140,2610
NetR39_2: R39.2 U11.6 | length 86.5
  Top Layer w10: R39.2@3314.53,2405 3314.53,2405.24 3324.29,2415 3340.24,2415 3367.8,2387.44 3376.5,2387.44 3376.57,2387.36 U11.6@3376.57,2378.66
NetR41_2: R41.2 U6.62 | length 117.8
  Top Layer w10: U6.62@4951.44,2116.63 4952.09,2115.98 4952.09,2060.72 4972.66,2040.15 4987.46,2040.15 R41.2@5000,2027.6
NetR43_1: R43.1 U6.35 | length 261.2
  Top Layer w10: R43.1@4565.93,2565.29 4564.22,2565.29 4545,2546.06 4545,2525 4500,2480 4500,2454.52 4505.86,2448.66 U6.35@4619.69,2448.66
NetR44_1: R44.1 U6.37 | length 344.2
  Top Layer w10: U6.37@4619.69,2409.29 4664.29,2409.29 4675,2420 4675,2640 4640.99,2674.01 4640.99,2675.39 4631.38,2685 R44.1@4630,2685
NetR45_1: R45.1 U6.18 | length 252.3
  Top Layer w10: U6.18@4971.26,2564.01 4971.26,2607.56 4998.7,2635 5105,2635 R45.1@5150,2680
NetR48_2: R48.2 U11.9 | length 104.9
  Top Layer w10: R48.2@3375,2177.09 3375,2178.03 3388.86,2191.89 3389.8,2191.89 3415.87,2217.96 3415.87,2264.41 U11.9@3415.94,2264.49
NetR49_1: R49.1 R52.1 R64.2 R65.2 U11.8 | length 359.6
  Top Layer w10: R52.1@3145,2192.65 R52.1@3155,2202.65 ; 3380.51,2220 3396.26,2235.75 U11.8@3396.26,2264.49
  Top Layer w20: R49.1@3200,2192.65 3210.91,2203.59 3213.69,2203.59 3230.1,2220 3380.51,2220
  Top Layer w30: R52.1@3145,2192.65 R49.1@3200,2192.65 ; R52.1@3155,2202.65 R65.2@3155,2250.22
NetR50_2: R50.2 U1.9 | length 222.9
  Top Layer w10: R50.2@3240,2847.56 3240,2974.82 3280.78,3015.6 3318,3015.6 U1.9@3318.5,3016.1
NetR53_1: R53.1 U6.47 | length 490.2
  Top Layer w10: U6.47@4619.69,2212.44 4672.56,2212.44 4682.12,2202.88 4682.12,2157.48 4642.91,2118.27 4642.91,2074.66 v1(4644.57,2073)
  Bottom Layer w10: v1(4375,2055) 4626.57,2055 v1(4644.57,2073)
NetR54_1: R54.1 U6.43 | length 621.3
  Top Layer w10: U6.43@4619.69,2291.18 4659.18,2291.18 4685.36,2265 4715,2235.36 v1(4715,2195)
  Bottom Layer w10: v1(4310,2060) 4310,2062.71 4327.29,2080 4600,2080 v1(4715,2195)
NetR56_1: R56.1 U6.40 | length 86.3
  Top Layer w10: R56.1@4537.6,2340 4547.84,2350.23 U6.40@4619.69,2350.23
NetR58_2: R58.2 U9.10 U9.11 | length 160.8
  Top Layer w10: U9.11@4865,3122.09 4877.68,3122.09 U9.10@4885.08,3122.09
  Top Layer w30: 4874.51,3132.65 4874.51,3268.92 R58.2@4877.68,3272.09
NetR59_2: R59.2 U9.4 U9.5 U9.6 | length 123.1
  Top Layer w10: R59.2@4844.88,2925 4844.88,2930 4844.92,2930.05 U9.4@4844.92,3007.91 U9.5@4865,3007.91 U9.6@4885.08,3007.91
NetR60_2: R60.2 U11.4 | length 96.3
  Top Layer w10: U11.4@3415.94,2378.66 R60.2@3415.94,2475
NetR61_1: R61.1 U6.36 | length 168.1
  Top Layer w10: R61.1@4454.34,2435.66 4461.03,2428.97 U6.36@4619.69,2428.97
NetR62_1: R62.1 U6.39 | length 347.3
  Top Layer w10: U6.39@4619.69,2369.92 4664.56,2369.92 4695,2400.36 4695,2475 v1(4732.68,2512.68)
  Bottom Layer w10: v1(4625,2570) 4675.36,2570 v1(4732.68,2512.68)
NetR63_2: R63.2 U6.34 | length 261.8
  Top Layer w10: v1(4530,2474.64) 4531.3,2473.34 4555,2473.34 4560,2468.34 U6.34@4619.69,2468.34
  Bottom Layer w10: v1(4395,2420) 4395,2440 4429.82,2474.82 4529.82,2474.82 v1(4530,2474.64)
NetU1_8: U1.8 U3.3 Y1.1 | length 1519.5
  Top Layer w10: U1.8@3318.5,3035.79 3374.21,3035.79 3375,3035 ; Y1.1@3506.69,2858.5 3416.5,2858.5 3375,2900 3375,3035 ; v1(3570,3430) 3570,3427.29 3565,3422.29 3565,3210.86 3559.14,3205 3459.64,3205 3375,3120.36 3375,3035 ; v1(4105,3515) 4105,3483.58 U3.3@4106.18,3482.4
  Bottom Layer w10: v1(3570,3430) 3705,3565 3902.5,3565 3952.5,3515 v1(4105,3515)
NetU4_9: U4.9 Y1.3 | length 215.8
  Top Layer w10: Y1.3@3582.56,2928.75 3596.71,2928.75 3604.14,2936.18 3604.14,2950.32 3630.43,2976.61 U4.9@3770.24,2976.61
NRST: J2.4 R2.1 U1.5 | length 372.5
  Top Layer w10: J2.4@3035,3235 3079.92,3190.08 3079.92,3155.08 3130,3105 R2.1@3192.56,3105 ; R2.1@3180,3099.88 3185.04,3094.84 U1.5@3318.5,3094.84
PA1_VDD: R15.1 R38.2 | length 498.8
  Top Layer w10: R15.1@4437.56,3622.56 R15.1@4440,3625 R15.1@4444.06,3629.06
  Top Layer w30: R15.1@4444.06,3629.06 v1(4444.06,3688.83) ; R38.2@4525,3305 v1(4525,3360)
  Bottom Layer w30: v1@4445,3690 4445,3595 4480,3560 4480,3385 4505,3360 v1(4525,3360)
PICO: J8.10 R63.1 U1.14 | length 2358.2
  Top Layer w10: v1(3415,3035) 3435.47,3055.47 U1.14@3491.5,3055.47 ; J8.10@4010,1933.51 4378.51,1933.51 4415,1970 4415,2320.51 4397.06,2338.45 4397.06,2362.94 v1(4395,2365)
  Bottom Layer w10: v1(3415,3035) 3415,3032.57 3395,3012.57 3395,2755 3755,2395 4265,2395 4290,2370 4390,2370 v1(4395,2365)
POCI: J8.7 R54.2 U1.12 | length 3014.7
  Top Layer w10: v1(3420,2970) 3421.91,2971.91 3421.91,2996.91 3440.6,3015.6 3491,3015.6 U1.12@3491.5,3016.1 ; J8.7@3710,1933.51 3829.58,2053.09 3873.09,2053.09 v1(3875,2055) ; R54.2@4307.5,2117.6 4307.5,2122.5 v1(4310,2125)
  Bottom Layer w10: v1(3420,2970) 3420,2785 3705,2500 4585.36,2500 4720,2365.36 4720,2346.53 4708.79,2335.32 v1(4708.79,2303.79) ; v1(3875,2055) 3900,2055 3985,2140 4295,2140 v1(4310,2125) ; v1@4310.86,2125 4320.86,2135 4560,2135 4710,2285 v1@4710,2303.79
SCK: J8.8 R56.2 U1.11 | length 3191.5
  Top Layer w10: v1@3450,2940.86 3450,2990.06 3455.86,2995.92 3491,2995.92 U1.11@3491.5,2996.42 ; J8.8@3810,1933.51 3878.88,2002.39 3926.52,2050 v1(3970,2050) ; v1(4690,2360) 4742.29,2360 4747.29,2365 v1(4750,2365)
  Bottom Layer w10: v1(3450,2940) 3450,2800 3725,2525 4595,2525 4625,2495 4650,2495 4750,2395 v1(4750,2365) 4770,2345 4770,2300 4570,2100 4020,2100 v1(3970,2050) ; v1(4485,2340) 4667.57,2340 4687.57,2360 v1(4690,2360)
SRB1: R37.1
SRB2: R45.2
SWCLK: J2.5 U1.16 | length 472.4
  Top Layer w10: v1(3410,3120) 3435.08,3094.92 3490.76,3094.92 U1.16@3490.8,3094.88
  Bottom Layer w10: J2.5@3035,3135 3044.54,3125.46 3401.83,3125.46 3407.29,3120 v1(3410,3120)
SWDIO: J2.6 U1.15 | length 473.1
  Top Layer w10: v1(3405,3075) 3405.08,3075.08 3491.42,3075.08 U1.15@3491.5,3075.16
  Bottom Layer w10: J2.6@3035,3035 3362.29,3035 3402.29,3075 v1(3405,3075)
TXD: J1.6 U1.2 | length 696.9
  Top Layer w10: v1(3245,3205) 3245,3160.26 3250.86,3154.4 3318,3154.4 U1.2@3318.5,3153.9
  Bottom Layer w10: v1(3245,3205) 3365,3325 3365,3505 J1.6@3525,3665
UART_Rx: J1.5 U1.1 | length 641.9
  Top Layer w10: U1.1@3318.5,3173.58 3358.58,3173.58 3435,3250 3435,3385 3625,3575 J1.5@3625,3665
VBAT: C6.2 C18.2 C19.1 C61.1 C62.1 C63.1 C64.1 C65.1 C66.1 C67.1 C68.1 C69.1 C70.1 L1.1 L5.1 R4.1 R48.1 R55.2 SW1.3 U2.3 U5.5 U5.6 U11.3 | length 3965.6
  Top Layer w10: R48.1@3375,2121.89 R48.1@3376.89,2120 ; U11.3@3435.63,2378.66 3435.63,2410.12 v1@3465.26,2439.74 ; L5.1@3605,2514.5 L5.1@3605.52,2515.02 ; L1.1@3911.84,2470.87 3957.99,2470.87 3982.99,2445.86 3982.99,2305.87 3998.86,2290 U2.3@4024.21,2290 ; C64.1@4370.3,2525.32 C64.1@4390,2545.02 ; R55.2@4405.77,2615.96 R55.2@4411.41,2621.61
  Top Layer w15: U5.5@4287.6,2616.79 U5.6@4325,2616.79
  Top Layer w20: R48.1@3376.68,2121.68 3438.21,2121.68 C18.2@3439.88,2120 ; R4.1@4280.59,2270.87 4281.03,2270.43 4327.01,2270.43 C6.2@4327.44,2270 4331.21,2273.77 4331.21,2296.21 4345,2310 4345,2545.02 ; U5.6@4326.41,2615.96 R55.2@4405.77,2615.96
  Top Layer w30: v1@3465.26,2439.74 3540,2514.49 L5.1@3605,2514.5 ; SW1.3@3483.43,3326.73 3483.43,3301.14 3519.57,3265 v1(3535,3265) ; 3630,2627.49 v1(3630,2800) ; C64.1@4405,2545.02 4414.7,2554.72 4439.72,2554.72 4439.78,2554.78 C19.1@4480,2554.78
  Top Layer w40: C65.1@4155,2627.49 4158.97,2627.49 4163.67,2622.79 4163.67,2618.82 4237.47,2545.02 4345,2545.02 C64.1@4385.3,2545.02 ; C64.1@4411.41,2560 R55.2@4411.41,2621.61
  Top Layer w50: C70.1@3285,2627.49 C69.1@3370,2627.49 C68.1@3470,2627.49 C63.1@3555,2627.49 3630,2627.49 C66.1@3841.64,2627.49 ; L5.1@3605.52,2515.02 C61.1@3735,2515.02 3825,2515.02 L1.1@3923.32,2515.02 ; C66.1@3850,2627.49 3923.35,2627.49 ; L1.1@3911.84,2470.87 3923.35,2482.37 3923.35,2515 3923.35,2627.49 ; C65.1@4151.33,2627.19 4000.3,2627.19 C67.1@4000,2627.49 3923.35,2627.49
  Bottom Layer w15: v1(3535,3265) 3535,2895 v1(3630,2800)
  Bottom Layer w20: v1(3375.94,2120.94) 3505,2250 3505,2400 v1(3465,2440)
VREFP: C29.2 C30.2 U6.24 | length 235.3
  Top Layer w10: U6.24@4853.15,2564.01 4853.66,2564.52 4853.66,2627.4 C29.2@4929.1,2702.83 C30.2@4994.1,2702.83
pads on no net: R34.3 SW1.1 SW1.4 SW1.5 SW1.6 U1.4 U3.5 U4.1 U4.17 U4.26 U4.27 U4.28 U5.4 U6.13 U6.14 U6.27 U6.29 U6.64 U10.5

## Polygon pours and split planes (outlines as drawn)
3V3 on VCC "3V3_L03_P000" (solid, pour order 0): 2980,3730 5540,3730 5540,1850 2980,1850
GND on GND "GND_L02_P001" (solid, pour order 1): 2980,3730 5540,3730 5540,1850 2980,1850

## Silkscreen, mask and mechanical layers (free items; w line width, h text height)
Top Overlay:
  text "DTCP RF Tx 2.0" at 3020,2535 h40 r270
  text "+" at 5405,2448.34 h40
  text "-" at 5405,2240.01 h40
  text "J. Dados, D. Stavskyi, L. Wong" at 4160,1878.33 h40
Mechanical 1:
  the board outline again, w0

## Text inside footprints (layer, text, board x,y; h text height)
U1: Top 3D Body "*" at 3346.5,3134.5 h50; Top Overlay "*" at 3296,3179.58 h50